# EAGLE board Qwiic_Accelerometer-MMA8452Q (EAGLE 7.7.0)
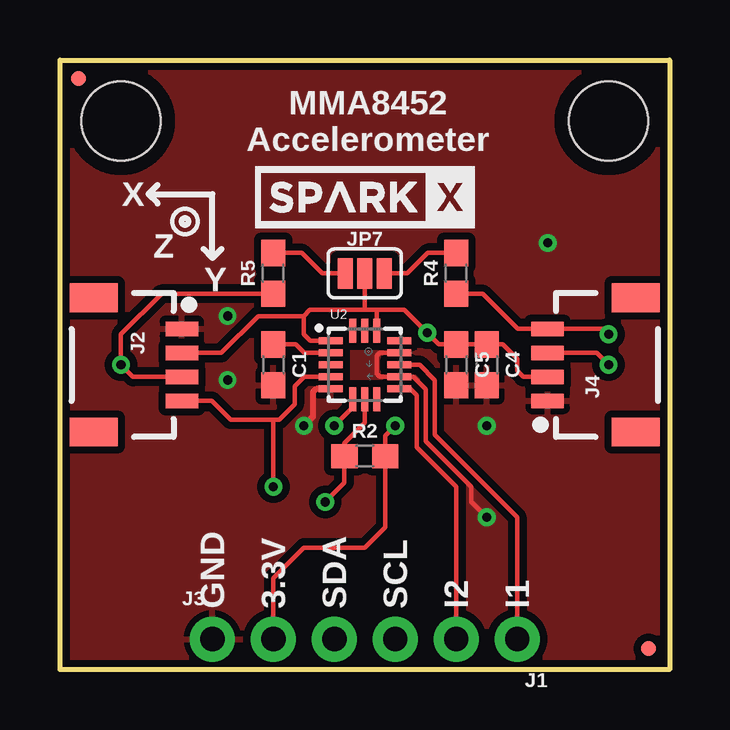
[diagram p0: board, top side]
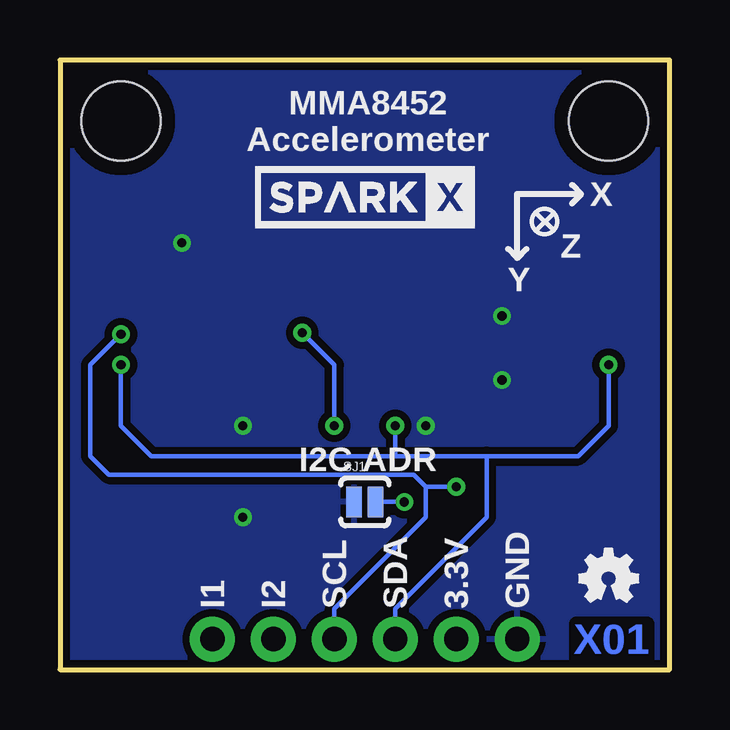
[diagram p1: board, bottom side, seen from below]

Size 25.4 x 25.4 mm. Coordinates in mm from the lower left corner, seen from the top.
Outline: 0,0 0,25.4 25.4,25.4 25.4,0 0,0
Copper layers (1*16): Top 0.035mm / dielectric 1.5mm / Bottom 0.035mm
Design rules "SparkFun-2-layer-TIGHT": minimum track width 7mil, minimum drill 15mil, track to track 7mil, track to pad 7mil, pad to pad 7mil, via to via 7mil, smd to smd 7mil, copper to edge 7mil, drill to drill 7mil, minimum pad ring 7mil, minimum via ring 7mil, stop-mask expansion 4mil, vias tented up to drill 25mil, thermal gap 10mil

## Footprints (pad centres in the part's own frame; a part is rotated, then mirrored left to right if it is on the bottom)
0603 = smd 1.1 x 1: 1 -0.85,0; 2 0.85,0
1X02_NO_SILK = drill 1.016 pad 1.88: 1 0,0; 2 2.54,0
1X04_1MM_RA = smd 0.6 x 1.35: 1 -1.5,0; 2 -0.5,0; 3 0.5,0; 4 1.5,0 | smd 1.2 x 2: NC1 2.8,-3.675; NC2 -2.8,-3.675
1X04_NO_SILK = drill 1.016 pad 1.88: 1 0,0; 2 2.54,0; 3 5.08,0; 4 7.62,0
MICRO-FIDUCIAL = smd 0.635 x 0.635: 1 0,0
STAND-OFF = hole 3.302: 0,0
SMT-JUMPER_3_2-NC_PASTE_SILK = smd 0.635 x 1.27: 1 -0.813,0; 2 0,0; 3 0.813,0
SJ_2S-NO = smd 0.635 x 1.27: 1 -0.45,0; 2 0.45,0
QFN-16_0.5MM = smd 1 x 0.3: 1 -1.425,1; 2 -1.425,0.5; 3 -1.425,0; 4 -1.425,-0.5; 5 -1.425,-1; 9 1.425,-1; 10 1.425,-0.5; 11 1.425,0; 12 1.425,0.5; 13 1.425,1 | smd 0.3 x 1: 6 -0.5,-1.425; 7 0,-1.425; 8 0.5,-1.425; 14 0.5,1.425; 15 0,1.425; 16 -0.5,1.425

## Placement (x,y rotation side)
C1  0.1uF  [0603]  8.89,12.7 270 top
C4  0.1uF  [0603]  17.78,12.7 270 top
C5  4.7uF  [0603]  16.51,12.7 270 top
FRAME1  FRAME-LETTER  [CREATIVE_COMMONS]  -20.32,-17.78 0 top  (outside the outline)
J1  [1X02_NO_SILK]  19.05,1.27 180 top
J2  SMD  [1X04_1MM_RA]  5.08,12.7 270 top
J3  PTH  [1X04_NO_SILK]  6.35,1.27 0 top
J4  SMD  [1X04_1MM_RA]  20.32,12.7 90 top
JP2  FIDUCIALUFIDUCIAL  [MICRO-FIDUCIAL]  24.51,0.89 0 top
JP3  STAND-OFF  [STAND-OFF]  2.54,22.86 0 top
JP4  STAND-OFF  [STAND-OFF]  22.86,22.86 0 top
JP6  FIDUCIALUFIDUCIAL  [MICRO-FIDUCIAL]  0.76,24.64 0 top
JP7  [SMT-JUMPER_3_2-NC_PASTE_SILK]  12.7,16.51 0 top
LOGO1  OSHW-LOGOMINI  [OSHW-LOGO-MINI]  2.54,3.81 0 bottom
R2  10k  [0603]  12.7,8.89 0 top
R4  4.7k  [0603]  16.51,16.51 90 top
R5  4.7k  [0603]  8.89,16.51 90 top
SJ1  [SJ_2S-NO]  12.7,6.99 0 bottom
U2  MMA8452Q  [QFN-16_0.5MM]  12.7,12.7 0 top
U$1  SPARKX-LOGO4  [SPARKX-MEDIUM]  12.7,19.68 0 bottom
U$2  SPARKX-LOGO4  [SPARKX-MEDIUM]  12.7,19.68 0 top

## Library data of the parts
C1 C4 = SparkFun-Capacitors; PROD_ID: CAP-00810
C5 = SparkFun-Capacitors; PROD_ID: CAP-08280
FRAME1 LOGO1 = SparkFun-Aesthetics
J1 = SparkFun-Connectors
J2-J4 U2 U$1 U$2 = SparkX
JP2-JP4 JP6 SJ1 = SparkFun
JP7 = SparkFun-Jumpers
R2 = SparkFun-Resistors; PROD_ID: RES-00824
R4 R5 = SparkFun-Resistors; PROD_ID: RES-07857

## Nets
3.3V: C4.1 C5.1 J2.2 J3.2 J4.2 JP7.2 R2.2 U2.1 U2.14
BYP: C1.1 U2.2
GND: C1.2 C4.2 C5.2 J2.1 J3.1 J4.1 SJ1.1 U2.5 U2.10 U2.12
INT1: J1.1 U2.11
INT2: J1.2 U2.9
N$1: JP7.1 R5.2
N$2: JP7.3 R4.2
SA0: R2.1 SJ1.2 U2.7
SCL: J2.4 J3.4 J4.4 R4.1 U2.4
SDA: J2.3 J3.3 J4.3 R5.1 U2.6

## Tracks (layer width: path | path; a pad name or v marks a point on that pad's centre or on a via)
3.3V  (via drill 0.38)
  Top 0.178: J4.2 19.3,12.2 19.05,12.45 19.05,12.95 18.45,13.55 C4.1 C5.1 15.79,13.55 v15.3,14.03 14.35,14.99 13.21,14.99 | 10.16,14.73 8.26,14.73 6.72,13.2 J2.2 | U2.1 10.43,13.7 10.16,13.97 10.16,14.73 | v13.97,10.16 13.55,9.74 R2.2 13.55,5.93 12.7,5.08 10.16,5.08 8.89,3.81 J3.2 | 13.21,14.99 12.7,14.99 | 12.7,14.99 10.41,14.99 10.16,14.73 | U2.14 13.2,14.98 13.21,14.99 | JP7.2 12.7,14.99
  Bottom 0.178: v13.97,10.16 13.97,12.7 v15.3,14.03
BYP
  Top 0.178: U2.2 10.17,13.2 9.82,13.55 C1.1
GND  (via drill 0.38)
  Top 0.178: v17.78,6.35 17.14,6.99 17.14,7.62 15.24,9.53 15.24,11.68 14.72,12.2 U2.10 13.33,12.2 13.21,12.32 13.21,13.08 13.33,13.2 U2.12
  Top 0.254: U2.5 10.68,11.7 10.54,11.56 10.54,10.54 v10.16,10.16
  other vias: 6.99,12.06 6.99,14.73 17.78,10.16 20.32,17.78
  pour Bottom (isolate 0.305): 0,0 0,25.4 25.4,25.4 25.4,0
  pour Top (isolate 0.305): 0,0 0,25.4 25.4,25.4 25.4,0
INT1
  Top 0.178: U2.11 14.99,12.7 15.62,12.06 15.62,9.78 19.05,6.35 J1.1
INT2
  Top 0.178: U2.9 14.59,11.7 14.86,11.43 14.86,9.27 16.51,7.62 J1.2
N$1
  Top 0.178: JP7.1 10.92,16.51 10.07,17.36 R5.2
N$2
  Top 0.178: JP7.3 14.48,16.51 15.33,17.36 R4.2
SA0  (via drill 0.38)
  Top 0.178: U2.7 12.7,10.29 11.85,9.44 R2.1 11.85,7.79 v11.05,6.99
  Bottom 0.178: SJ1.2 v11.05,6.99
SCL  (via drill 0.38)
  Top 0.178: R4.1 17.61,15.66 19.07,14.2 J4.4 22.63,14.2 v22.86,13.97 | U2.4 10.17,12.2 9.78,11.81 9.78,11.05 9.14,10.41 8.89,10.41 | 8.89,10.41 7.11,10.41 6.33,11.2 J2.4 | 8.89,10.41 v8.89,7.62
  Bottom 0.178: v22.86,13.97 24.13,12.7 24.13,8.89 23.37,8.13 10.67,8.13 10.16,7.62 | J3.4 13.97,2.54 10.16,6.35 10.16,7.62 | 10.16,7.62 v8.89,7.62
SDA  (via drill 0.38)
  Top 0.178: U2.6 12.2,10.93 v11.43,10.16 | J4.3 22.36,13.2 v22.86,12.7 | J2.3 3.04,12.2 v2.54,12.7 2.54,13.97 4.23,15.66 R5.1
  Bottom 0.178: v22.86,12.7 22.86,10.16 21.59,8.89 11.43,8.89 | 11.43,8.89 7.62,8.89 | 7.62,8.89 3.81,8.89 2.54,10.16 v2.54,12.7 | J3.3 11.43,2.54 7.62,6.35 7.62,8.89 | v11.43,10.16 11.43,8.89

## Text on the board
Bottom: X01
tPlace: MMA8452 / Accelerometer | X | Z | Y | GND | 3.3V | SDA | SCL | I2 | I1
bPlace: MMA8452 / Accelerometer | X | Z | Y | I2C ADR | GND | 3.3V | SDA | SCL | I2 | I1